# Altium PCB BUSBAR_18650_12S.PcbDoc (part 1 of 2)
Units mm, origin at the board's own origin, x right, y up, seen from the top; angles counter-clockwise.
Board outline 250.7 x 47.4 mm, 2 copper layers (Top Layer, Bottom Layer), stack 1.571 mm thick; 467 components, 25 nets, 999 pads, 401 vias.
Unrouted connection lines stored in the file: 23.
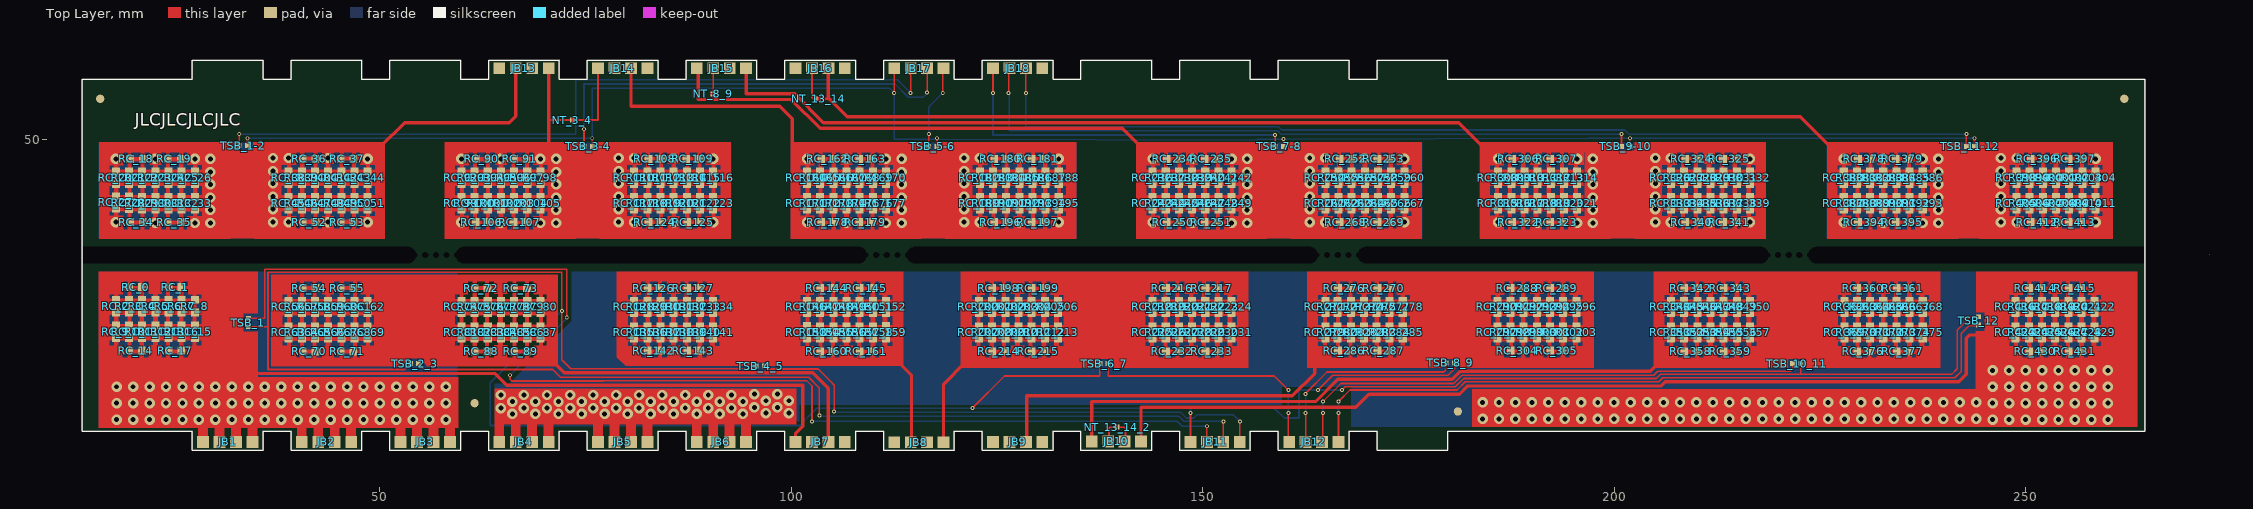
[diagram p0: Top Layer view]
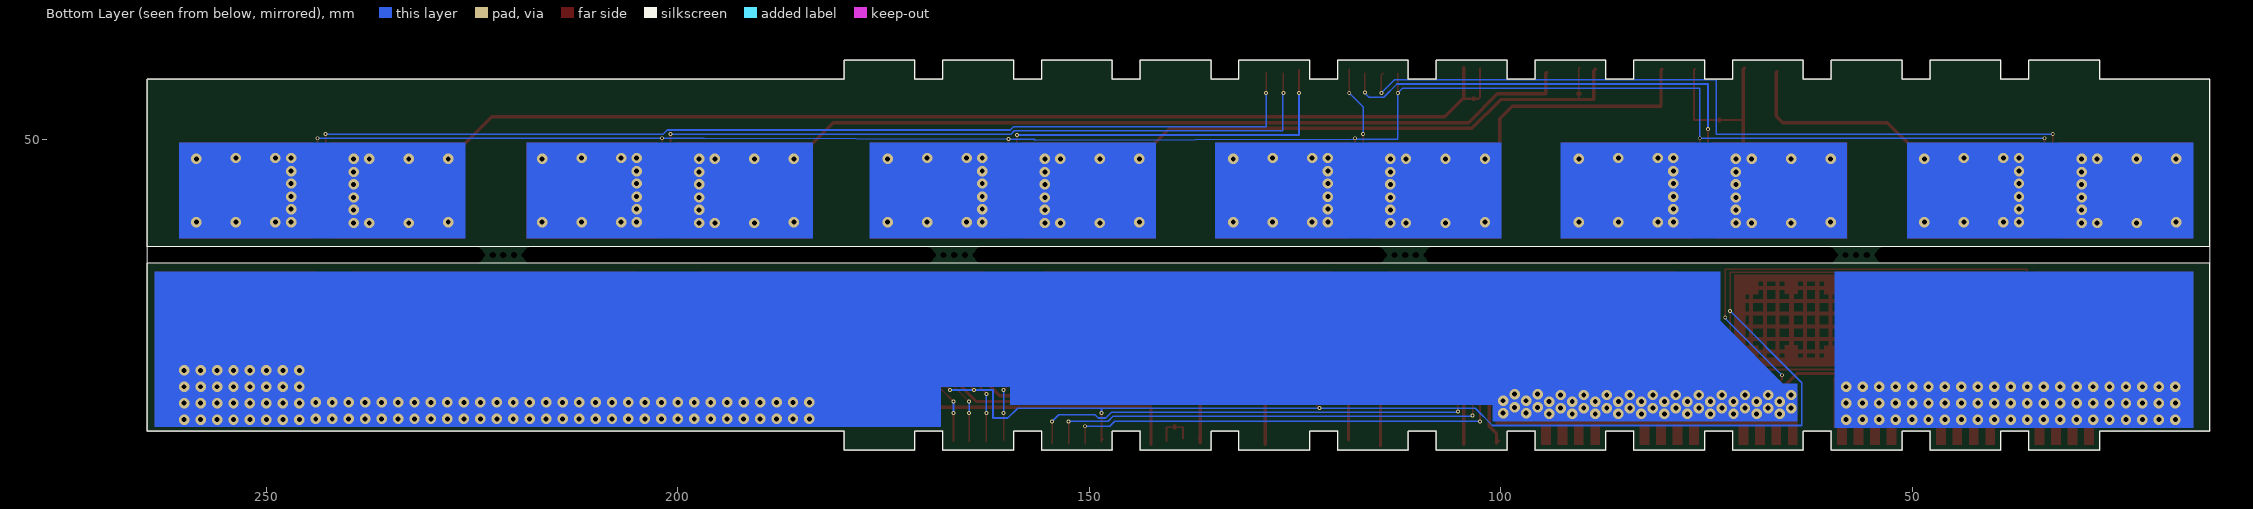
[diagram p1: Bottom Layer view, seen from below]
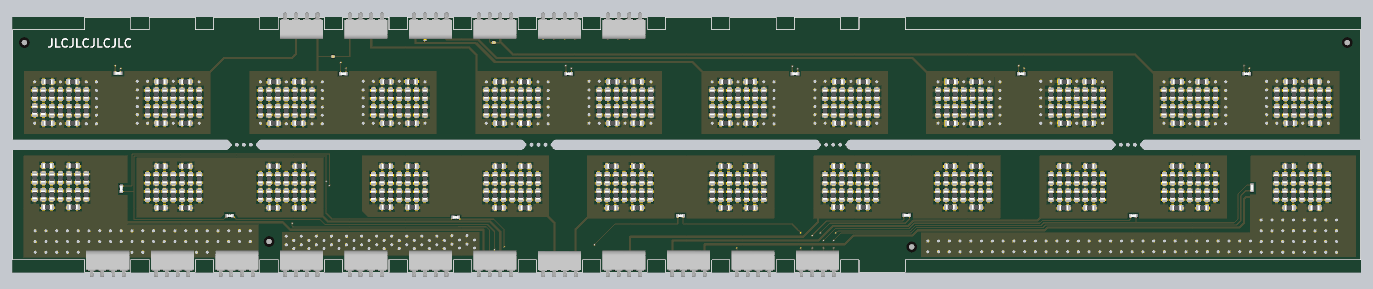
[diagram p3: 3D render of the assembled board from above, using the file's embedded part models]

## Layer stack, top to bottom
Top Solder: solder mask 0.0102, Solder Resist, Dk 3.5
Top Layer: signal copper 0.0356
Dielectric 1: core 1.5, FR-4, Dk 4.2
Bottom Layer: signal copper 0.0356
Bottom Solder: solder mask 0.0102, Solder Resist, Dk 3.5

## Board outline
27.2,12.3 35.8,12.3 35.8,14.6 39.2,14.6 39.2,12.3 47.8,12.3 47.8,14.6 51.2,14.6 51.2,12.3 59.8,12.3 59.8,14.6 63.2,14.6 63.2,12.3 71.8,12.3 71.8,14.6 75.2,14.6 75.2,12.3 83.8,12.3 83.8,14.6 87.2,14.6 87.2,12.3 95.8,12.3 95.8,14.6 99.2,14.6 99.2,12.3 107.8,12.3 107.8,14.6 111.2,14.6 111.2,12.3 119.8,12.3 119.8,14.6 123.2,14.6 123.2,12.3 131.8,12.3 131.8,14.6 135.2,14.6 135.2,12.3 143.8,12.3 143.8,14.6 147.2,14.6 147.2,12.3 155.8,12.3 155.8,14.6 159.2,14.6 159.2,12.3 167.8,12.3 167.8,14.6 171.2,14.6 171.2,12.3 179.8,12.3 179.8,14.6 264.5,14.6 264.5,57.4 179.8,57.4 179.8,59.7 171.2,59.7 171.2,57.4 167.8,57.4 167.8,59.7 159.2,59.7 159.2,57.4 155.8,57.4 155.8,59.7 147.2,59.7 147.2,57.4 143.8,57.4 143.8,59.7 135.2,59.7 135.2,57.4 131.8,57.4 131.8,59.7 123.2,59.7 123.2,57.4 119.8,57.4 119.8,59.7 111.2,59.7 111.2,57.4 107.8,57.4 107.8,59.7 99.2,59.7 99.2,57.4 95.8,57.4 95.8,59.7 87.2,59.7 87.2,57.4 83.8,57.4 83.8,59.7 75.2,59.7 75.2,57.4 71.8,57.4 71.8,59.7 63.2,59.7 63.2,57.4 59.8,57.4 59.8,59.7 51.2,59.7 51.2,57.4 47.8,57.4 47.8,59.7 39.2,59.7 39.2,57.4 35.8,57.4 35.8,59.7 27.2,59.7 27.2,57.4 13.8,57.4 13.8,35 13.8,14.6 27.2,14.6

## Design rules (kind name [scope] priority, off if disabled: settings)
Clearance [All] p1: gap=0.2 ignorepadtopadclearanceinfootprint=FALSE except(0: Arc-Hole Track-Hole SMDPad-Hole THPad-Hole Via-Hole Fill-Hole Poly-Hole Region-Hole Text-Hole)
PolygonConnect [All] p1: thpad.connectstyle=Relief thpad.reliefconductorwidth=0.254 thpad.reliefentries=4 thpad.polygonreliefangle="90 Angle" thpad.airgapwidth=0.254 smdpad.connectstyle=Relief smdpad.reliefconductorwidth=0.254 smdpad.reliefentries=4 smdpad.polygonreliefangle="90 Angle" smdpad.airgapwidth=0.254 via.connectstyle=Direct via.reliefconductorwidth=0.254 via.reliefentries=4 via.polygonreliefangle="90 Angle" via.airgapwidth=0.254
RoutingVias [All] p1: holewidth=0.711 width=1.27 viastyle="Through Hole" minholewidth=0.711 minwidth=1.27 maxholewidth=0.711 maxwidth=1.27
SolderMaskExpansion [All] p1: expansion=0.102
Width [All] p1: maxlimit=1 minlimit=0.2 preferedwidth=0.2 minimp=50.000000 maximp=50.000000 favimp=50.000000
30 further rules are at their usual default settings.

## Components (designator, comment, footprint, x,y, rotation, side; value= is the part's Value field where it differs from the comment)
JB1 "47615-0001" 47615-0001 31.5,14.55 r0 top
JB2 "47615-0001" 47615-0001 43.5,14.55 r0 top
JB3 "47615-0001" 47615-0001 55.5,14.55 r0 top
JB4 "47615-0001" 47615-0001 67.5,14.55 r0 top
JB5 "47615-0001" 47615-0001 79.5,14.55 r0 top
JB6 "47615-0001" 47615-0001 91.5,14.55 r0 top
JB7 "47615-0001" 47615-0001 103.5,14.55 r0 top
JB8 "47615-0001" 47615-0001 115.5,14.5 r0 top
JB9 "47615-0001" 47615-0001 127.5,14.55 r0 top
JB10 "47615-0001" 47615-0001 139.5,14.6 r0 top
JB11 "47615-0001" 47615-0001 151.5,14.55 r0 top
JB12 "47615-0001" 47615-0001 163.5,14.55 r0 top
JB13 "47615-0001" 47615-0001 67.5,57.45 r180 top
JB14 "47615-0001" 47615-0001 79.5,57.45 r180 top
JB15 "47615-0001" 47615-0001 91.5,57.45 r180 top
JB16 "47615-0001" 47615-0001 103.5,57.45 r180 top
JB17 "47615-0001" 47615-0001 115.5,57.45 r180 top
JB18 "47615-0001" 47615-0001 127.5,57.45 r180 top
NT_3_4 "0" NET_TIE 73.4,52.4 r180 top
NT_8_9 "0" NET_TIE 90.5,55.6 r90 top
NT_13_14 "0" NET_TIE 103.3,55 r0 top
NT_13_14_2 "0" NET_TIE 139.6,15.1 r0 top
RC_0 "0603WAF0000T5E" "RES 0603" 20.3,32.1 r180 top value=0R
RC_1 "0603WAF0000T5E" "RES 0603" 25.1,32.1 r180 top value=0R
RC_2 "0603WAF0000T5E" "RES 0603" 17.9,29.8 r270 top value=0R
RC_3 "0603WAF0000T5E" "RES 0603" 19.5,29.8 r90 top value=0R
RC_4 "0603WAF0000T5E" "RES 0603" 21.1,29.8 r90 top value=0R
RC_5 "0603WAF0000T5E" "RES 0603" 22.7,29.8 r90 top value=0R
RC_6 "0603WAF0000T5E" "RES 0603" 24.3,29.8 r90 top value=0R
RC_7 "0603WAF0000T5E" "RES 0603" 25.9,29.8 r90 top value=0R
RC_8 "0603WAF0000T5E" "RES 0603" 27.5,29.8 r270 top value=0R
RC_9 "0603WAF0000T5E" "RES 0603" 17.9,26.7 r90 top value=0R
RC_10 "0603WAF0000T5E" "RES 0603" 19.5,26.7 r270 top value=0R
RC_11 "0603WAF0000T5E" "RES 0603" 21.1,26.7 r270 top value=0R
RC_12 "0603WAF0000T5E" "RES 0603" 22.7,26.7 r270 top value=0R
RC_13 "0603WAF0000T5E" "RES 0603" 24.3,26.7 r270 top value=0R
RC_14 "0603WAF0000T5E" "RES 0603" 20.3,24.4 r180 top value=0R
RC_15 "0603WAF0000T5E" "RES 0603" 27.5,26.7 r270 top value=0R
RC_16 "0603WAF0000T5E" "RES 0603" 25.9,26.7 r90 top value=0R
RC_17 "0603WAF0000T5E" "RES 0603" 25.1,24.4 r180 top value=0R
RC_18 "0603WAF0000T5E" "RES 0603" 20.4,47.7 r180 top value=0R
RC_19 "0603WAF0000T5E" "RES 0603" 25,47.7 r180 top value=0R
RC_20 "0603WAF0000T5E" "RES 0603" 17.9,45.4 r270 top value=0R
RC_21 "0603WAF0000T5E" "RES 0603" 19.5,45.4 r270 top value=0R
RC_22 "0603WAF0000T5E" "RES 0603" 21.1,45.4 r90 top value=0R
RC_23 "0603WAF0000T5E" "RES 0603" 22.7,45.4 r90 top value=0R
RC_24 "0603WAF0000T5E" "RES 0603" 24.3,45.4 r90 top value=0R
RC_25 "0603WAF0000T5E" "RES 0603" 25.9,45.4 r270 top value=0R
RC_26 "0603WAF0000T5E" "RES 0603" 27.5,45.4 r270 top value=0R
RC_27 "0603WAF0000T5E" "RES 0603" 17.9,42.4 r90 top value=0R
RC_28 "0603WAF0000T5E" "RES 0603" 19.5,42.37 r90 top value=0R
RC_29 "0603WAF0000T5E" "RES 0603" 21.1,42.3 r90 top value=0R
RC_30 "0603WAF0000T5E" "RES 0603" 22.7,42.3 r270 top value=0R
RC_31 "0603WAF0000T5E" "RES 0603" 24.3,42.3 r270 top value=0R
RC_32 "0603WAF0000T5E" "RES 0603" 25.9,42.3 r90 top value=0R
RC_33 "0603WAF0000T5E" "RES 0603" 27.5,42.3 r90 top value=0R
RC_34 "0603WAF0000T5E" "RES 0603" 20.4,40 r180 top value=0R
RC_35 "0603WAF0000T5E" "RES 0603" 25,40 r180 top value=0R
RC_36 "0603WAF0000T5E" "RES 0603" 41.4,47.7 r0 top value=0R
RC_37 "0603WAF0000T5E" "RES 0603" 46,47.7 r0 top value=0R
RC_38 "0603WAF0000T5E" "RES 0603" 38.9,45.4 r90 top value=0R
RC_39 "0603WAF0000T5E" "RES 0603" 40.5,45.4 r270 top value=0R
RC_40 "0603WAF0000T5E" "RES 0603" 42.1,45.4 r90 top value=0R
RC_41 "0603WAF0000T5E" "RES 0603" 43.7,45.4 r270 top value=0R
RC_42 "0603WAF0000T5E" "RES 0603" 45.3,45.4 r270 top value=0R
RC_43 "0603WAF0000T5E" "RES 0603" 46.9,45.4 r90 top value=0R
RC_44 "0603WAF0000T5E" "RES 0603" 48.5,45.4 r270 top value=0R
RC_45 "0603WAF0000T5E" "RES 0603" 38.9,42.3 r270 top value=0R
RC_46 "0603WAF0000T5E" "RES 0603" 40.5,42.3 r270 top value=0R
RC_47 "0603WAF0000T5E" "RES 0603" 42.1,42.3 r90 top value=0R
RC_48 "0603WAF0000T5E" "RES 0603" 43.7,42.3 r270 top value=0R
RC_49 "0603WAF0000T5E" "RES 0603" 45.3,42.3 r90 top value=0R
RC_50 "0603WAF0000T5E" "RES 0603" 46.9,42.3 r270 top value=0R
RC_51 "0603WAF0000T5E" "RES 0603" 48.5,42.3 r270 top value=0R
RC_52 "0603WAF0000T5E" "RES 0603" 41.4,40 r180 top value=0R
RC_53 "0603WAF0000T5E" "RES 0603" 46,40 r0 top value=0R
RC_54 "0603WAF0000T5E" "RES 0603" 41.4,32 r180 top value=0R
RC_55 "0603WAF0000T5E" "RES 0603" 46,32 r180 top value=0R
RC_56 "0603WAF0000T5E" "RES 0603" 38.9,29.7 r270 top value=0R
RC_57 "0603WAF0000T5E" "RES 0603" 40.5,29.7 r90 top value=0R
RC_58 "0603WAF0000T5E" "RES 0603" 42.1,29.7 r90 top value=0R
RC_59 "0603WAF0000T5E" "RES 0603" 43.7,29.7 r90 top value=0R
RC_60 "0603WAF0000T5E" "RES 0603" 45.3,29.7 r90 top value=0R
RC_61 "0603WAF0000T5E" "RES 0603" 46.9,29.7 r270 top value=0R
RC_62 "0603WAF0000T5E" "RES 0603" 48.5,29.7 r90 top value=0R
RC_63 "0603WAF0000T5E" "RES 0603" 38.9,26.6 r90 top value=0R
RC_64 "0603WAF0000T5E" "RES 0603" 40.5,26.6 r90 top value=0R
RC_65 "0603WAF0000T5E" "RES 0603" 42.1,26.6 r90 top value=0R
RC_66 "0603WAF0000T5E" "RES 0603" 43.7,26.6 r90 top value=0R
RC_67 "0603WAF0000T5E" "RES 0603" 45.3,26.6 r90 top value=0R
RC_68 "0603WAF0000T5E" "RES 0603" 46.9,26.6 r90 top value=0R
RC_69 "0603WAF0000T5E" "RES 0603" 48.5,26.6 r90 top value=0R
RC_70 "0603WAF0000T5E" "RES 0603" 41.4,24.3 r180 top value=0R
RC_71 "0603WAF0000T5E" "RES 0603" 46,24.3 r180 top value=0R
RC_72 "0603WAF0000T5E" "RES 0603" 62.3,32 r180 top value=0R
RC_73 "0603WAF0000T5E" "RES 0603" 67.1,32 r180 top value=0R
RC_74 "0603WAF0000T5E" "RES 0603" 59.9,29.7 r90 top value=0R
RC_75 "0603WAF0000T5E" "RES 0603" 61.5,29.7 r90 top value=0R
RC_76 "0603WAF0000T5E" "RES 0603" 63.1,29.7 r90 top value=0R
RC_77 "0603WAF0000T5E" "RES 0603" 64.7,29.7 r90 top value=0R
RC_78 "0603WAF0000T5E" "RES 0603" 66.3,29.7 r90 top value=0R
RC_79 "0603WAF0000T5E" "RES 0603" 67.9,29.7 r90 top value=0R
RC_80 "0603WAF0000T5E" "RES 0603" 69.5,29.7 r90 top value=0R
RC_81 "0603WAF0000T5E" "RES 0603" 59.9,26.6 r270 top value=0R
RC_82 "0603WAF0000T5E" "RES 0603" 61.5,26.6 r270 top value=0R
RC_83 "0603WAF0000T5E" "RES 0603" 63.1,26.6 r270 top value=0R
RC_84 "0603WAF0000T5E" "RES 0603" 64.7,26.6 r90 top value=0R
RC_85 "0603WAF0000T5E" "RES 0603" 66.3,26.6 r90 top value=0R
RC_86 "0603WAF0000T5E" "RES 0603" 67.9,26.6 r90 top value=0R
RC_87 "0603WAF0000T5E" "RES 0603" 69.5,26.6 r90 top value=0R
RC_88 "0603WAF0000T5E" "RES 0603" 62.3,24.3 r180 top value=0R
RC_89 "0603WAF0000T5E" "RES 0603" 67.1,24.3 r180 top value=0R
RC_90 "0603WAF0000T5E" "RES 0603" 62.4,47.7 r180 top value=0R
RC_91 "0603WAF0000T5E" "RES 0603" 67,47.7 r180 top value=0R
RC_92 "0603WAF0000T5E" "RES 0603" 59.9,45.4 r90 top value=0R
RC_93 "0603WAF0000T5E" "RES 0603" 61.5,45.4 r90 top value=0R
RC_94 "0603WAF0000T5E" "RES 0603" 63.1,45.4 r270 top value=0R
RC_95 "0603WAF0000T5E" "RES 0603" 64.7,45.4 r90 top value=0R
RC_96 "0603WAF0000T5E" "RES 0603" 66.3,45.4 r90 top value=0R
RC_97 "0603WAF0000T5E" "RES 0603" 67.9,45.4 r90 top value=0R
RC_98 "0603WAF0000T5E" "RES 0603" 69.5,45.4 r90 top value=0R
RC_99 "0603WAF0000T5E" "RES 0603" 59.9,42.3 r270 top value=0R
RC_100 "0603WAF0000T5E" "RES 0603" 61.5,42.3 r90 top value=0R
RC_101 "0603WAF0000T5E" "RES 0603" 63.1,42.3 r90 top value=0R
RC_102 "0603WAF0000T5E" "RES 0603" 64.7,42.3 r90 top value=0R
RC_103 "0603WAF0000T5E" "RES 0603" 66.3,42.3 r90 top value=0R
RC_104 "0603WAF0000T5E" "RES 0603" 67.9,42.3 r270 top value=0R
RC_105 "0603WAF0000T5E" "RES 0603" 69.5,42.3 r90 top value=0R
RC_106 "0603WAF0000T5E" "RES 0603" 62.4,40 r180 top value=0R
RC_107 "0603WAF0000T5E" "RES 0603" 67,40 r180 top value=0R
RC_108 "0603WAF0000T5E" "RES 0603" 83.4,47.7 r180 top value=0R
RC_109 "0603WAF0000T5E" "RES 0603" 88,47.7 r180 top value=0R
RC_110 "0603WAF0000T5E" "RES 0603" 80.9,45.4 r90 top value=0R
RC_111 "0603WAF0000T5E" "RES 0603" 82.5,45.4 r90 top value=0R
RC_112 "0603WAF0000T5E" "RES 0603" 84.1,45.4 r90 top value=0R
RC_113 "0603WAF0000T5E" "RES 0603" 85.7,45.4 r90 top value=0R
RC_114 "0603WAF0000T5E" "RES 0603" 87.3,45.4 r90 top value=0R
RC_115 "0603WAF0000T5E" "RES 0603" 88.9,45.4 r90 top value=0R
RC_116 "0603WAF0000T5E" "RES 0603" 90.5,45.4 r90 top value=0R
RC_117 "0603WAF0000T5E" "RES 0603" 80.9,42.3 r90 top value=0R
RC_118 "0603WAF0000T5E" "RES 0603" 82.5,42.3 r90 top value=0R
RC_119 "0603WAF0000T5E" "RES 0603" 84.1,42.3 r90 top value=0R
RC_120 "0603WAF0000T5E" "RES 0603" 85.7,42.3 r90 top value=0R
RC_121 "0603WAF0000T5E" "RES 0603" 87.3,42.3 r90 top value=0R
RC_122 "0603WAF0000T5E" "RES 0603" 88.9,42.3 r90 top value=0R
RC_123 "0603WAF0000T5E" "RES 0603" 90.5,42.3 r90 top value=0R
RC_124 "0603WAF0000T5E" "RES 0603" 83.4,40 r180 top value=0R
RC_125 "0603WAF0000T5E" "RES 0603" 88.1,40 r180 top value=0R
RC_126 "0603WAF0000T5E" "RES 0603" 83.3,32 r180 top value=0R
RC_127 "0603WAF0000T5E" "RES 0603" 88.1,32 r180 top value=0R
RC_128 "0603WAF0000T5E" "RES 0603" 80.9,29.7 r90 top value=0R
RC_129 "0603WAF0000T5E" "RES 0603" 82.5,29.7 r90 top value=0R
RC_130 "0603WAF0000T5E" "RES 0603" 84.1,29.7 r90 top value=0R
RC_131 "0603WAF0000T5E" "RES 0603" 85.7,29.7 r90 top value=0R
RC_132 "0603WAF0000T5E" "RES 0603" 87.3,29.7 r90 top value=0R
RC_133 "0603WAF0000T5E" "RES 0603" 88.9,29.7 r270 top value=0R
RC_134 "0603WAF0000T5E" "RES 0603" 90.5,29.7 r90 top value=0R
RC_135 "0603WAF0000T5E" "RES 0603" 80.9,26.6 r270 top value=0R
RC_136 "0603WAF0000T5E" "RES 0603" 82.5,26.6 r270 top value=0R
RC_137 "0603WAF0000T5E" "RES 0603" 84.1,26.6 r90 top value=0R
RC_138 "0603WAF0000T5E" "RES 0603" 85.7,26.6 r270 top value=0R
RC_139 "0603WAF0000T5E" "RES 0603" 87.3,26.6 r90 top value=0R
RC_140 "0603WAF0000T5E" "RES 0603" 88.9,26.6 r90 top value=0R
RC_141 "0603WAF0000T5E" "RES 0603" 90.5,26.6 r90 top value=0R
RC_142 "0603WAF0000T5E" "RES 0603" 83.3,24.4 r180 top value=0R
RC_143 "0603WAF0000T5E" "RES 0603" 88.1,24.4 r180 top value=0R
RC_144 "0603WAF0000T5E" "RES 0603" 104.3,32 r180 top value=0R
RC_145 "0603WAF0000T5E" "RES 0603" 109.1,32 r180 top value=0R
RC_146 "0603WAF0000T5E" "RES 0603" 101.9,29.7 r90 top value=0R
RC_147 "0603WAF0000T5E" "RES 0603" 103.5,29.7 r90 top value=0R
RC_148 "0603WAF0000T5E" "RES 0603" 105.1,29.7 r90 top value=0R
RC_149 "0603WAF0000T5E" "RES 0603" 106.7,29.7 r90 top value=0R
RC_150 "0603WAF0000T5E" "RES 0603" 108.3,29.7 r270 top value=0R
RC_151 "0603WAF0000T5E" "RES 0603" 109.9,29.7 r90 top value=0R
RC_152 "0603WAF0000T5E" "RES 0603" 111.5,29.7 r90 top value=0R
RC_153 "0603WAF0000T5E" "RES 0603" 101.9,26.63 r90 top value=0R
RC_154 "0603WAF0000T5E" "RES 0603" 103.5,26.6 r90 top value=0R
RC_155 "0603WAF0000T5E" "RES 0603" 105.1,26.6 r90 top value=0R
RC_156 "0603WAF0000T5E" "RES 0603" 106.7,26.6 r90 top value=0R
RC_157 "0603WAF0000T5E" "RES 0603" 108.3,26.6 r90 top value=0R
RC_158 "0603WAF0000T5E" "RES 0603" 109.9,26.6 r90 top value=0R
RC_159 "0603WAF0000T5E" "RES 0603" 111.5,26.63 r90 top value=0R
RC_160 "0603WAF0000T5E" "RES 0603" 104.3,24.3 r180 top value=0R
RC_161 "0603WAF0000T5E" "RES 0603" 109.1,24.3 r180 top value=0R
RC_162 "0603WAF0000T5E" "RES 0603" 104.4,47.7 r180 top value=0R
RC_163 "0603WAF0000T5E" "RES 0603" 109,47.7 r180 top value=0R
RC_164 "0603WAF0000T5E" "RES 0603" 101.9,45.4 r90 top value=0R
RC_165 "0603WAF0000T5E" "RES 0603" 103.5,45.4 r90 top value=0R
RC_166 "0603WAF0000T5E" "RES 0603" 105.1,45.4 r90 top value=0R
RC_167 "0603WAF0000T5E" "RES 0603" 106.7,45.4 r90 top value=0R
RC_168 "0603WAF0000T5E" "RES 0603" 108.3,45.4 r90 top value=0R
RC_169 "0603WAF0000T5E" "RES 0603" 109.9,45.4 r90 top value=0R
RC_170 "0603WAF0000T5E" "RES 0603" 111.5,45.4 r90 top value=0R
RC_171 "0603WAF0000T5E" "RES 0603" 101.9,42.3 r90 top value=0R
RC_172 "0603WAF0000T5E" "RES 0603" 103.5,42.3 r90 top value=0R
RC_173 "0603WAF0000T5E" "RES 0603" 105.1,42.3 r90 top value=0R
RC_174 "0603WAF0000T5E" "RES 0603" 106.7,42.3 r90 top value=0R
RC_175 "0603WAF0000T5E" "RES 0603" 108.3,42.3 r90 top value=0R
RC_176 "0603WAF0000T5E" "RES 0603" 109.9,42.3 r90 top value=0R
RC_177 "0603WAF0000T5E" "RES 0603" 111.5,42.3 r90 top value=0R
RC_178 "0603WAF0000T5E" "RES 0603" 104.4,40 r180 top value=0R
RC_179 "0603WAF0000T5E" "RES 0603" 109,40 r180 top value=0R
RC_180 "0603WAF0000T5E" "RES 0603" 125.43,47.7 r180 top value=0R
RC_181 "0603WAF0000T5E" "RES 0603" 129.97,47.7 r180 top value=0R
RC_182 "0603WAF0000T5E" "RES 0603" 122.9,45.4 r90 top value=0R
RC_183 "0603WAF0000T5E" "RES 0603" 124.5,45.4 r90 top value=0R
RC_184 "0603WAF0000T5E" "RES 0603" 126.1,45.4 r90 top value=0R
RC_185 "0603WAF0000T5E" "RES 0603" 127.7,45.4 r90 top value=0R
RC_186 "0603WAF0000T5E" "RES 0603" 129.3,45.4 r90 top value=0R
RC_187 "0603WAF0000T5E" "RES 0603" 130.9,45.4 r90 top value=0R
RC_188 "0603WAF0000T5E" "RES 0603" 132.5,45.4 r90 top value=0R
RC_189 "0603WAF0000T5E" "RES 0603" 122.9,42.3 r90 top value=0R
RC_190 "0603WAF0000T5E" "RES 0603" 124.5,42.3 r90 top value=0R
RC_191 "0603WAF0000T5E" "RES 0603" 126.1,42.3 r90 top value=0R
RC_192 "0603WAF0000T5E" "RES 0603" 127.7,42.3 r90 top value=0R
RC_193 "0603WAF0000T5E" "RES 0603" 129.3,42.3 r90 top value=0R
RC_194 "0603WAF0000T5E" "RES 0603" 130.9,42.3 r90 top value=0R
RC_195 "0603WAF0000T5E" "RES 0603" 132.5,42.3 r90 top value=0R
RC_196 "0603WAF0000T5E" "RES 0603" 125.43,40 r180 top value=0R
RC_197 "0603WAF0000T5E" "RES 0603" 129.97,40 r180 top value=0R
RC_198 "0603WAF0000T5E" "RES 0603" 125.2,32 r180 top value=0R
RC_199 "0603WAF0000T5E" "RES 0603" 130,32 r180 top value=0R
RC_200 "0603WAF0000T5E" "RES 0603" 122.8,29.7 r90 top value=0R
RC_201 "0603WAF0000T5E" "RES 0603" 124.4,29.7 r90 top value=0R
RC_202 "0603WAF0000T5E" "RES 0603" 126,29.7 r90 top value=0R
RC_203 "0603WAF0000T5E" "RES 0603" 127.6,29.7 r90 top value=0R
RC_204 "0603WAF0000T5E" "RES 0603" 129.2,29.7 r90 top value=0R
RC_205 "0603WAF0000T5E" "RES 0603" 130.8,29.7 r90 top value=0R
RC_206 "0603WAF0000T5E" "RES 0603" 132.4,29.7 r90 top value=0R
RC_207 "0603WAF0000T5E" "RES 0603" 122.8,26.6 r90 top value=0R
RC_208 "0603WAF0000T5E" "RES 0603" 124.4,26.6 r90 top value=0R
RC_209 "0603WAF0000T5E" "RES 0603" 126,26.6 r90 top value=0R
RC_210 "0603WAF0000T5E" "RES 0603" 127.6,26.6 r90 top value=0R
RC_211 "0603WAF0000T5E" "RES 0603" 129.2,26.6 r90 top value=0R
RC_212 "0603WAF0000T5E" "RES 0603" 130.8,26.6 r90 top value=0R
RC_213 "0603WAF0000T5E" "RES 0603" 132.4,26.6 r90 top value=0R
RC_214 "0603WAF0000T5E" "RES 0603" 125.2,24.3 r180 top value=0R
RC_215 "0603WAF0000T5E" "RES 0603" 130,24.3 r180 top value=0R
RC_216 "0603WAF0000T5E" "RES 0603" 146.3,32 r180 top value=0R
RC_217 "0603WAF0000T5E" "RES 0603" 151.1,32 r180 top value=0R
RC_218 "0603WAF0000T5E" "RES 0603" 143.9,29.7 r90 top value=0R
RC_219 "0603WAF0000T5E" "RES 0603" 145.5,29.7 r90 top value=0R
RC_220 "0603WAF0000T5E" "RES 0603" 147.1,29.7 r90 top value=0R
RC_221 "0603WAF0000T5E" "RES 0603" 148.7,29.7 r90 top value=0R
RC_222 "0603WAF0000T5E" "RES 0603" 150.3,29.7 r90 top value=0R
RC_223 "0603WAF0000T5E" "RES 0603" 151.9,29.7 r90 top value=0R
RC_224 "0603WAF0000T5E" "RES 0603" 153.5,29.7 r90 top value=0R
RC_225 "0603WAF0000T5E" "RES 0603" 143.9,26.6 r90 top value=0R
RC_226 "0603WAF0000T5E" "RES 0603" 145.5,26.6 r90 top value=0R
RC_227 "0603WAF0000T5E" "RES 0603" 147.1,26.6 r90 top value=0R
RC_228 "0603WAF0000T5E" "RES 0603" 148.7,26.6 r90 top value=0R
RC_229 "0603WAF0000T5E" "RES 0603" 150.3,26.6 r90 top value=0R
RC_230 "0603WAF0000T5E" "RES 0603" 151.9,26.6 r90 top value=0R
RC_231 "0603WAF0000T5E" "RES 0603" 153.5,26.6 r90 top value=0R
RC_232 "0603WAF0000T5E" "RES 0603" 146.3,24.3 r180 top value=0R
RC_233 "0603WAF0000T5E" "RES 0603" 151.1,24.3 r180 top value=0R
RC_234 "0603WAF0000T5E" "RES 0603" 146.4,47.7 r180 top value=0R
RC_235 "0603WAF0000T5E" "RES 0603" 151,47.7 r180 top value=0R
RC_236 "0603WAF0000T5E" "RES 0603" 143.9,45.4 r90 top value=0R
RC_237 "0603WAF0000T5E" "RES 0603" 145.5,45.4 r90 top value=0R
RC_238 "0603WAF0000T5E" "RES 0603" 147.1,45.4 r90 top value=0R
RC_239 "0603WAF0000T5E" "RES 0603" 148.7,45.4 r90 top value=0R
RC_240 "0603WAF0000T5E" "RES 0603" 150.3,45.4 r90 top value=0R
RC_241 "0603WAF0000T5E" "RES 0603" 151.9,45.4 r90 top value=0R
RC_242 "0603WAF0000T5E" "RES 0603" 153.5,45.4 r90 top value=0R
RC_243 "0603WAF0000T5E" "RES 0603" 143.9,42.3 r90 top value=0R
RC_244 "0603WAF0000T5E" "RES 0603" 145.5,42.3 r90 top value=0R
RC_245 "0603WAF0000T5E" "RES 0603" 147.1,42.3 r90 top value=0R
RC_246 "0603WAF0000T5E" "RES 0603" 148.7,42.3 r90 top value=0R
RC_247 "0603WAF0000T5E" "RES 0603" 150.3,42.3 r90 top value=0R
RC_248 "0603WAF0000T5E" "RES 0603" 151.9,42.3 r90 top value=0R
RC_249 "0603WAF0000T5E" "RES 0603" 153.5,42.3 r90 top value=0R
RC_250 "0603WAF0000T5E" "RES 0603" 146.4,40 r180 top value=0R
RC_251 "0603WAF0000T5E" "RES 0603" 151,40 r180 top value=0R
RC_252 "0603WAF0000T5E" "RES 0603" 167.4,47.7 r180 top value=0R
RC_253 "0603WAF0000T5E" "RES 0603" 172,47.7 r180 top value=0R
RC_254 "0603WAF0000T5E" "RES 0603" 164.9,45.4 r90 top value=0R
RC_255 "0603WAF0000T5E" "RES 0603" 166.5,45.4 r90 top value=0R
RC_256 "0603WAF0000T5E" "RES 0603" 168.1,45.4 r90 top value=0R
RC_257 "0603WAF0000T5E" "RES 0603" 169.7,45.4 r90 top value=0R
RC_258 "0603WAF0000T5E" "RES 0603" 171.3,45.4 r90 top value=0R
RC_259 "0603WAF0000T5E" "RES 0603" 172.9,45.4 r90 top value=0R
RC_260 "0603WAF0000T5E" "RES 0603" 174.5,45.4 r90 top value=0R
RC_261 "0603WAF0000T5E" "RES 0603" 164.9,42.3 r90 top value=0R
RC_262 "0603WAF0000T5E" "RES 0603" 166.5,42.3 r90 top value=0R
RC_263 "0603WAF0000T5E" "RES 0603" 168.1,42.3 r90 top value=0R
RC_264 "0603WAF0000T5E" "RES 0603" 169.7,42.3 r90 top value=0R
RC_265 "0603WAF0000T5E" "RES 0603" 171.3,42.3 r90 top value=0R
RC_266 "0603WAF0000T5E" "RES 0603" 172.9,42.3 r90 top value=0R
RC_267 "0603WAF0000T5E" "RES 0603" 174.5,42.3 r90 top value=0R
RC_268 "0603WAF0000T5E" "RES 0603" 167.4,40 r180 top value=0R
RC_269 "0603WAF0000T5E" "RES 0603" 172,40 r180 top value=0R
RC_270 "0603WAF0000T5E" "RES 0603" 172,32 r180 top value=0R
RC_271 "0603WAF0000T5E" "RES 0603" 164.9,29.7 r90 top value=0R
RC_272 "0603WAF0000T5E" "RES 0603" 166.4,29.7 r90 top value=0R
RC_273 "0603WAF0000T5E" "RES 0603" 168,29.7 r90 top value=0R
RC_274 "0603WAF0000T5E" "RES 0603" 169.6,29.7 r90 top value=0R
RC_275 "0603WAF0000T5E" "RES 0603" 171.1,29.7 r90 top value=0R
RC_276 "0603WAF0000T5E" "RES 0603" 167.2,32 r180 top value=0R
RC_277 "0603WAF0000T5E" "RES 0603" 172.7,29.7 r90 top value=0R
RC_278 "0603WAF0000T5E" "RES 0603" 174.3,29.7 r90 top value=0R
RC_279 "0603WAF0000T5E" "RES 0603" 164.9,26.6 r90 top value=0R
RC_280 "0603WAF0000T5E" "RES 0603" 166.4,26.6 r90 top value=0R
RC_281 "0603WAF0000T5E" "RES 0603" 168,26.6 r90 top value=0R
RC_282 "0603WAF0000T5E" "RES 0603" 169.6,26.6 r90 top value=0R
RC_283 "0603WAF0000T5E" "RES 0603" 171.1,26.6 r90 top value=0R
RC_284 "0603WAF0000T5E" "RES 0603" 172.7,26.6 r90 top value=0R
RC_285 "0603WAF0000T5E" "RES 0603" 174.3,26.6 r90 top value=0R
RC_286 "0603WAF0000T5E" "RES 0603" 167.2,24.4 r180 top value=0R
RC_287 "0603WAF0000T5E" "RES 0603" 172,24.4 r180 top value=0R
RC_288 "0603WAF0000T5E" "RES 0603" 188.2,32 r180 top value=0R
RC_289 "0603WAF0000T5E" "RES 0603" 193,32 r180 top value=0R
RC_290 "0603WAF0000T5E" "RES 0603" 185.8,29.7 r90 top value=0R
RC_291 "0603WAF0000T5E" "RES 0603" 187.4,29.7 r90 top value=0R
RC_292 "0603WAF0000T5E" "RES 0603" 189,29.7 r90 top value=0R
RC_293 "0603WAF0000T5E" "RES 0603" 190.6,29.7 r90 top value=0R
RC_294 "0603WAF0000T5E" "RES 0603" 192.2,29.7 r90 top value=0R
RC_295 "0603WAF0000T5E" "RES 0603" 193.8,29.7 r90 top value=0R
RC_296 "0603WAF0000T5E" "RES 0603" 195.4,29.7 r90 top value=0R
RC_297 "0603WAF0000T5E" "RES 0603" 185.8,26.6 r90 top value=0R
RC_298 "0603WAF0000T5E" "RES 0603" 187.4,26.6 r90 top value=0R
RC_299 "0603WAF0000T5E" "RES 0603" 189,26.6 r90 top value=0R
RC_300 "0603WAF0000T5E" "RES 0603" 190.6,26.6 r90 top value=0R
RC_301 "0603WAF0000T5E" "RES 0603" 192.2,26.6 r90 top value=0R
RC_302 "0603WAF0000T5E" "RES 0603" 193.8,26.6 r90 top value=0R
RC_303 "0603WAF0000T5E" "RES 0603" 195.4,26.6 r90 top value=0R
RC_304 "0603WAF0000T5E" "RES 0603" 188.2,24.4 r180 top value=0R
RC_305 "0603WAF0000T5E" "RES 0603" 193,24.4 r180 top value=0R
RC_306 "0603WAF0000T5E" "RES 0603" 188.4,47.7 r180 top value=0R
RC_307 "0603WAF0000T5E" "RES 0603" 193,47.7 r180 top value=0R
RC_308 "0603WAF0000T5E" "RES 0603" 185.9,45.4 r90 top value=0R
RC_309 "0603WAF0000T5E" "RES 0603" 187.5,45.4 r90 top value=0R
RC_310 "0603WAF0000T5E" "RES 0603" 189.1,45.4 r90 top value=0R
RC_311 "0603WAF0000T5E" "RES 0603" 190.7,45.4 r90 top value=0R
RC_312 "0603WAF0000T5E" "RES 0603" 192.3,45.4 r90 top value=0R
RC_313 "0603WAF0000T5E" "RES 0603" 193.9,45.4 r90 top value=0R
RC_314 "0603WAF0000T5E" "RES 0603" 195.5,45.4 r90 top value=0R
RC_315 "0603WAF0000T5E" "RES 0603" 185.9,42.3 r90 top value=0R
RC_316 "0603WAF0000T5E" "RES 0603" 187.5,42.3 r90 top value=0R
RC_317 "0603WAF0000T5E" "RES 0603" 189.1,42.3 r90 top value=0R
RC_318 "0603WAF0000T5E" "RES 0603" 190.7,42.3 r90 top value=0R
RC_319 "0603WAF0000T5E" "RES 0603" 192.3,42.3 r90 top value=0R
RC_320 "0603WAF0000T5E" "RES 0603" 193.9,42.3 r90 top value=0R
RC_321 "0603WAF0000T5E" "RES 0603" 195.5,42.3 r90 top value=0R
RC_322 "0603WAF0000T5E" "RES 0603" 188.4,40 r180 top value=0R
RC_323 "0603WAF0000T5E" "RES 0603" 193,40 r180 top value=0R
RC_324 "0603WAF0000T5E" "RES 0603" 209.4,47.7 r180 top value=0R
RC_325 "0603WAF0000T5E" "RES 0603" 214,47.7 r180 top value=0R
RC_326 "0603WAF0000T5E" "RES 0603" 206.9,45.4 r90 top value=0R
RC_327 "0603WAF0000T5E" "RES 0603" 208.5,45.4 r90 top value=0R
RC_328 "0603WAF0000T5E" "RES 0603" 210.1,45.4 r90 top value=0R
RC_329 "0603WAF0000T5E" "RES 0603" 211.7,45.4 r90 top value=0R
RC_330 "0603WAF0000T5E" "RES 0603" 213.3,45.4 r90 top value=0R
RC_331 "0603WAF0000T5E" "RES 0603" 214.9,45.4 r90 top value=0R
RC_332 "0603WAF0000T5E" "RES 0603" 216.5,45.4 r90 top value=0R
RC_333 "0603WAF0000T5E" "RES 0603" 206.9,42.3 r90 top value=0R
RC_334 "0603WAF0000T5E" "RES 0603" 208.5,42.3 r90 top value=0R
RC_335 "0603WAF0000T5E" "RES 0603" 210.1,42.3 r90 top value=0R
RC_336 "0603WAF0000T5E" "RES 0603" 211.7,42.3 r90 top value=0R
RC_337 "0603WAF0000T5E" "RES 0603" 213.3,42.3 r90 top value=0R
RC_338 "0603WAF0000T5E" "RES 0603" 214.9,42.3 r90 top value=0R
RC_339 "0603WAF0000T5E" "RES 0603" 216.5,42.3 r90 top value=0R
RC_340 "0603WAF0000T5E" "RES 0603" 209.4,40 r180 top value=0R
RC_341 "0603WAF0000T5E" "RES 0603" 214,40 r180 top value=0R
RC_342 "0603WAF0000T5E" "RES 0603" 209.3,32 r180 top value=0R
RC_343 "0603WAF0000T5E" "RES 0603" 214.1,32 r180 top value=0R
RC_344 "0603WAF0000T5E" "RES 0603" 206.9,29.7 r90 top value=0R
RC_345 "0603WAF0000T5E" "RES 0603" 208.5,29.7 r90 top value=0R
RC_346 "0603WAF0000T5E" "RES 0603" 210.1,29.7 r90 top value=0R
RC_347 "0603WAF0000T5E" "RES 0603" 211.7,29.7 r90 top value=0R
RC_348 "0603WAF0000T5E" "RES 0603" 213.3,29.7 r90 top value=0R
RC_349 "0603WAF0000T5E" "RES 0603" 214.9,29.7 r90 top value=0R
RC_350 "0603WAF0000T5E" "RES 0603" 216.5,29.7 r90 top value=0R
RC_351 "0603WAF0000T5E" "RES 0603" 206.9,26.6 r90 top value=0R
RC_352 "0603WAF0000T5E" "RES 0603" 208.5,26.6 r90 top value=0R
RC_353 "0603WAF0000T5E" "RES 0603" 210.1,26.6 r90 top value=0R
RC_354 "0603WAF0000T5E" "RES 0603" 211.7,26.6 r90 top value=0R
RC_355 "0603WAF0000T5E" "RES 0603" 213.3,26.6 r90 top value=0R
RC_356 "0603WAF0000T5E" "RES 0603" 214.9,26.6 r90 top value=0R
RC_357 "0603WAF0000T5E" "RES 0603" 216.5,26.6 r90 top value=0R
RC_358 "0603WAF0000T5E" "RES 0603" 209.3,24.3 r180 top value=0R
RC_359 "0603WAF0000T5E" "RES 0603" 214.1,24.3 r180 top value=0R
RC_360 "0603WAF0000T5E" "RES 0603" 230.3,32 r180 top value=0R
RC_361 "0603WAF0000T5E" "RES 0603" 235.1,32 r180 top value=0R
RC_362 "0603WAF0000T5E" "RES 0603" 228,29.7 r90 top value=0R
RC_363 "0603WAF0000T5E" "RES 0603" 229.5,29.7 r90 top value=0R
RC_364 "0603WAF0000T5E" "RES 0603" 231.1,29.7 r90 top value=0R
RC_365 "0603WAF0000T5E" "RES 0603" 232.7,29.7 r90 top value=0R
RC_366 "0603WAF0000T5E" "RES 0603" 234.3,29.7 r90 top value=0R
RC_367 "0603WAF0000T5E" "RES 0603" 235.9,29.7 r90 top value=0R
RC_368 "0603WAF0000T5E" "RES 0603" 237.5,29.7 r90 top value=0R
RC_369 "0603WAF0000T5E" "RES 0603" 228,26.6 r90 top value=0R
RC_370 "0603WAF0000T5E" "RES 0603" 229.5,26.6 r90 top value=0R
RC_371 "0603WAF0000T5E" "RES 0603" 231.1,26.6 r90 top value=0R
RC_372 "0603WAF0000T5E" "RES 0603" 232.7,26.6 r90 top value=0R
RC_373 "0603WAF0000T5E" "RES 0603" 234.3,26.6 r90 top value=0R
RC_374 "0603WAF0000T5E" "RES 0603" 235.9,26.6 r90 top value=0R
RC_375 "0603WAF0000T5E" "RES 0603" 237.5,26.6 r90 top value=0R
RC_376 "0603WAF0000T5E" "RES 0603" 230.3,24.3 r180 top value=0R
RC_377 "0603WAF0000T5E" "RES 0603" 235.1,24.3 r180 top value=0R
RC_378 "0603WAF0000T5E" "RES 0603" 230.4,47.7 r180 top value=0R
RC_379 "0603WAF0000T5E" "RES 0603" 235,47.7 r180 top value=0R
RC_380 "0603WAF0000T5E" "RES 0603" 227.9,45.4 r90 top value=0R
RC_381 "0603WAF0000T5E" "RES 0603" 229.5,45.4 r90 top value=0R
RC_382 "0603WAF0000T5E" "RES 0603" 231.1,45.4 r90 top value=0R
RC_383 "0603WAF0000T5E" "RES 0603" 232.7,45.4 r90 top value=0R
RC_384 "0603WAF0000T5E" "RES 0603" 234.3,45.4 r90 top value=0R
RC_385 "0603WAF0000T5E" "RES 0603" 235.9,45.4 r90 top value=0R
RC_386 "0603WAF0000T5E" "RES 0603" 237.5,45.4 r90 top value=0R
RC_387 "0603WAF0000T5E" "RES 0603" 227.9,42.3 r90 top value=0R
RC_388 "0603WAF0000T5E" "RES 0603" 229.5,42.3 r90 top value=0R
RC_389 "0603WAF0000T5E" "RES 0603" 231.1,42.3 r90 top value=0R
RC_390 "0603WAF0000T5E" "RES 0603" 232.7,42.3 r90 top value=0R
RC_391 "0603WAF0000T5E" "RES 0603" 234.3,42.3 r90 top value=0R
RC_392 "0603WAF0000T5E" "RES 0603" 235.9,42.3 r90 top value=0R
RC_393 "0603WAF0000T5E" "RES 0603" 237.5,42.3 r90 top value=0R
RC_394 "0603WAF0000T5E" "RES 0603" 230.4,40 r180 top value=0R
RC_395 "0603WAF0000T5E" "RES 0603" 235,40 r180 top value=0R
RC_396 "0603WAF0000T5E" "RES 0603" 251.4,47.7 r180 top value=0R
RC_397 "0603WAF0000T5E" "RES 0603" 256,47.7 r180 top value=0R
RC_398 "0603WAF0000T5E" "RES 0603" 248.9,45.4 r90 top value=0R
RC_399 "0603WAF0000T5E" "RES 0603" 250.5,45.4 r90 top value=0R
RC_400 "0603WAF0000T5E" "RES 0603" 252.1,45.4 r90 top value=0R
RC_401 "0603WAF0000T5E" "RES 0603" 253.7,45.4 r90 top value=0R
RC_402 "0603WAF0000T5E" "RES 0603" 255.3,45.4 r90 top value=0R
RC_403 "0603WAF0000T5E" "RES 0603" 256.9,45.4 r90 top value=0R
RC_404 "0603WAF0000T5E" "RES 0603" 258.5,45.4 r90 top value=0R
RC_405 "0603WAF0000T5E" "RES 0603" 248.9,42.3 r90 top value=0R
RC_406 "0603WAF0000T5E" "RES 0603" 250.5,42.3 r90 top value=0R
RC_407 "0603WAF0000T5E" "RES 0603" 252.1,42.3 r90 top value=0R
RC_408 "0603WAF0000T5E" "RES 0603" 253.7,42.3 r90 top value=0R
RC_409 "0603WAF0000T5E" "RES 0603" 255.3,42.3 r90 top value=0R
RC_410 "0603WAF0000T5E" "RES 0603" 256.9,42.3 r90 top value=0R
RC_411 "0603WAF0000T5E" "RES 0603" 258.5,42.3 r90 top value=0R
RC_412 "0603WAF0000T5E" "RES 0603" 251.4,40 r180 top value=0R
RC_413 "0603WAF0000T5E" "RES 0603" 256,40 r180 top value=0R
RC_414 "0603WAF0000T5E" "RES 0603" 251.2,32 r180 top value=0R
RC_415 "0603WAF0000T5E" "RES 0603" 256,32 r180 top value=0R
RC_416 "0603WAF0000T5E" "RES 0603" 248.8,29.7 r90 top value=0R
RC_417 "0603WAF0000T5E" "RES 0603" 250.4,29.7 r90 top value=0R
RC_418 "0603WAF0000T5E" "RES 0603" 252,29.7 r90 top value=0R
RC_419 "0603WAF0000T5E" "RES 0603" 253.6,29.7 r90 top value=0R
RC_420 "0603WAF0000T5E" "RES 0603" 255.2,29.7 r90 top value=0R
RC_421 "0603WAF0000T5E" "RES 0603" 256.8,29.7 r90 top value=0R
RC_422 "0603WAF0000T5E" "RES 0603" 258.4,29.7 r90 top value=0R
RC_423 "0603WAF0000T5E" "RES 0603" 248.8,26.6 r90 top value=0R
RC_424 "0603WAF0000T5E" "RES 0603" 250.4,26.6 r90 top value=0R
RC_425 "0603WAF0000T5E" "RES 0603" 252,26.6 r90 top value=0R
RC_426 "0603WAF0000T5E" "RES 0603" 253.6,26.6 r90 top value=0R
RC_427 "0603WAF0000T5E" "RES 0603" 255.2,26.6 r90 top value=0R
RC_428 "0603WAF0000T5E" "RES 0603" 256.8,26.6 r90 top value=0R
RC_429 "0603WAF0000T5E" "RES 0603" 258.4,26.6 r90 top value=0R
RC_430 "0603WAF0000T5E" "RES 0603" 251.2,24.3 r180 top value=0R
RC_431 "0603WAF0000T5E" "RES 0603" 256,24.3 r180 top value=0R
TSB_1 "NCP15XH103F03RC" "RES 0402" 34,27.8 r270 top value=10k
TSB_1-2 "NCP15XH103F03RC" "RES 0402" 33.4,49.3 r180 top value=10k
TSB_2_3 "NCP15XH103F03RC" "RES 0402" 54.2,22.8 r0 top value=10k
TSB_3-4 "NCP15XH103F03RC" "RES 0402" 75.3,49.2 r180 top value=10k
TSB_4_5 "NCP15XH103F03RC" "RES 0402" 96.2,22.5 r0 top value=10k
TSB_5-6 "NCP15XH103F03RC" "RES 0402" 117.2,49.2 r180 top value=10k
TSB_6_7 "NCP15XH103F03RC" "RES 0402" 138,22.8 r0 top value=10k
TSB_7-8 "NCP15XH103F03RC" "RES 0402" 159.3,49.2 r180 top value=10k
TSB_8_9 "NCP15XH103F03RC" "RES 0402" 180.1,22.9 r180 top value=10k
TSB_9-10 "NCP15XH103F03RC" "RES 0402" 201.4,49.2 r180 top value=10k
TSB_10_11 "NCP15XH103F03RC" "RES 0402" 222.2,22.8 r180 top value=10k
TSB_11-12 "NCP15XH103F03RC" "RES 0402" 243.3,49.2 r180 top value=10k
TSB_12 "NCP15XH103F03RC" "RES 0402" 244.3,28 r90 top value=10k

## Footprints (in the part's own frame and the unit in brackets; to place one, negate y for a bottom-side part, rotate by r counter-clockwise, add the part's x,y. Pads: shape width x height; smd on the part's side, far side on the other; paste and mask are expansions set on the pad)
47615-0001 [mm] "BATTERY_SPRING 4P"
  rect 1.43x1.43 smd: 1(-3,-1.25) 2(-1,-1.25) 3(1,-1.25) 4(3,-1.25)
  body extent -4,-3.12 4,1.78, height 3.94
NET_TIE [mm] "Body 1.0 x 0.5 mm (LxW typ)"
  rect 0.2x0.6 smd: 1(-0.2,0) 2(0.2,0)
  Top Layer region: -0.2,-0.3 0.2,-0.3 0.2,0.3 -0.2,0.3
"RES 0402" [mm] "Body 1.0 x 0.5 mm (LxW typ)"
  rect 0.6x0.6 smd: 1(-0.508,0) 2(0.508,0)
  body extent -0.5,-0.25 0.5,0.25, height 0.35
"RES 0603" [mm] "Body 1.6 x 0.8 mm (LxW typ)"
  rect 0.93x0.98 smd: 1(-0.77,0) 2(0.77,0)
  body extent -0.82,-0.41 0.83,0.41, height 0.46